# Altium PCB PCB_SensorTapeFlex_v1.PcbDoc (part 3 of 4)
Units mm, origin at the board's own origin, x right, y up, seen from the top; angles counter-clockwise.
Board outline 228.71 x 24.8 mm, 2 copper layers (Top Layer, Bottom Layer); 234 components, 38 nets, 1134 pads, 768 vias.
Unrouted connection lines stored in the file: 1.
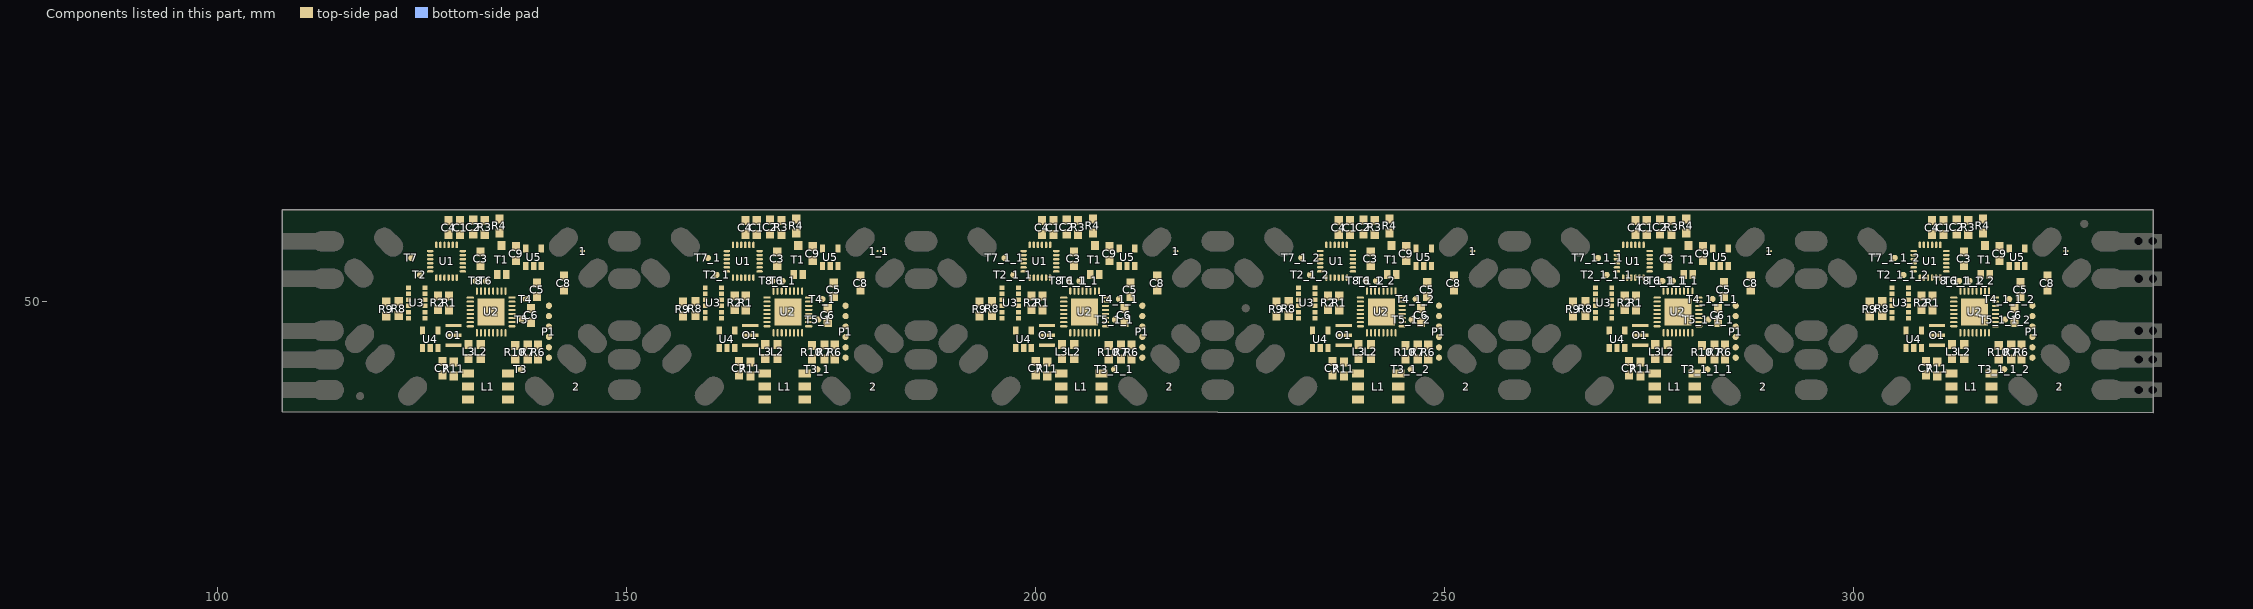
[diagram p3: the components of this part, seen from the top]

## Via types
v1: diameter 0.635, hole 0.381, Top Layer to Bottom Layer, tented both sides, 572 vias
v2: diameter 0.635, hole 0.4, Top Layer to Bottom Layer, tented both sides, 130 vias
v3: diameter 0.66, hole 0.33, Top Layer to Bottom Layer, tented both sides, 54 vias
v4: diameter 0.508, hole 0.508, Top Layer to Bottom Layer, tented both sides, 12 vias

## Nets (pads, with @x,y where several pads share a name; then routed paths per layer and width w, separated by ;. In a path a pad name is that pad's centre, name@x,y a point inside that pad or via, vN(x,y) a via of type N, cw(c..) or ccw(c..) an arc to the next point about the centre after c; other vN are vias at no path point) (continued)
copper on no net: | length 2649.3
  Top Layer w0.152: 144.189,56.217 144.424,56.21 ; v1(156.644,51.029) 159.83,54.215 160.733,54.215 ; 156.923,48.274 156.923,48.832 157.266,49.175 157.711,49.175 ; 156.923,49.974 156.923,50.479 158.193,51.749 159.654,51.749 ; 158.447,48.324 159.082,48.324 159.108,48.35 159.108,49.276 159.332,49.501 159.655,49.501 ; v1(159.082,54.686) 159.082,54.483 156.39,51.791 156.466,51.791 155.78,51.105 v1(155.78,48.336) 156.195,48.336 156.195,47.629 156.329,47.496 157.471,47.496 157.726,47.241 158.959,47.241 160.149,46.05 160.149,43.104 164.785,38.468 164.785,37.618 165.178,37.224 168.036,37.224 168.353,37.541 168.353,39.329 168.036,39.646 ; 159.654,48.002 160.119,48.002 160.555,48.438 160.555,51.969 160.86,52.273 162.219,52.273 162.511,51.981 ; 159.654,48.751 160.225,48.751 160.251,48.777 160.251,53.733 160.733,54.215 ; 159.92,54.216 159.92,55.271 ; 160.479,45.568 160.479,46.406 159.387,47.498 159.26,47.498 159.127,47.631 159.063,47.567 159.042,47.546 157.853,47.546 157.719,47.679 157.719,48.969 157.817,49.068 157.711,49.175 ; 160.479,45.619 160.479,43.409 162.867,41.021 163.781,41.021 163.781,41.035 ; 160.491,45.641 161.349,46.499 161.349,47.041 161.114,47.276 161.114,48.725 161.14,48.75 161.655,48.75 162.225,48.75 162.511,49.036 163.273,49.036 163.273,49.594 163.214,49.653 162.27,49.653 162.223,49.7 162.223,50.064 162.185,50.102 161.879,50.102 161.879,50.249 161.655,50.249 ; v1(160.835,54.788) 160.809,54.763 160.809,58.834 161.873,59.898 161.873,60.17 162.193,60.49 162.465,60.49 162.47,60.495 162.968,60.495 ; 161.038,52.261 161.038,53.34 ; 161.349,44.349 161.349,43.637 161.375,43.612 162.841,43.612 163.223,43.994 ; 161.655,49.499 161.348,49.499 161.114,49.733 161.114,51.722 161.14,51.747 161.655,51.747 161.939,51.747 162.184,51.502 162.184,50.47 162.248,50.406 162.481,50.406 162.545,50.343 162.545,49.987 162.574,49.957 165.716,49.957 ; 162.292,53.715 162.511,53.715 162.511,51.981 ; 162.292,54.215 160.733,54.215 ; 162.292,55.715 161.673,55.715 161.648,55.74 161.648,56.382 162.003,56.738 162.003,59.529 v1(162.419,59.944) ; 162.299,44.349 162.299,45.085 ; 162.92,60.49 163.804,60.49 164.124,60.17 164.124,60.095 164.289,59.93 165.94,59.93 166.753,59.93 ; 163.019,60.401 163.019,59.751 163.032,59.739 163.032,59.718 163.042,59.708 163.042,56.965 ; 163.266,49.035 164.917,49.035 ; 163.273,50.736 162.528,50.736 162.511,51.981 ; v1@163.411,54.765 164.465,54.765 164.848,54.382 165.014,54.215 166.291,54.215 166.892,54.215 167.744,55.067 167.744,55.41 168.455,56.121 ; v1(163.578,59.944) 163.578,59.081 163.578,58.256 163.603,58.23 164.289,58.23 ; 164.666,45.914 164.438,45.914 163.908,46.444 163.908,46.47 163.883,46.495 163.883,48.082 163.979,48.179 ; 164.848,54.466 164.848,56.272 164.913,56.336 165.198,56.336 165.42,56.558 165.42,56.844 165.541,56.965 165.541,57.379 165.94,57.778 165.94,58.23 ; 164.924,50.736 165.292,50.736 165.791,50.237 165.955,50.237 166.173,50.018 167.2,50.018 ; 165.152,44.706 165.465,44.706 166.278,45.52 166.542,45.52 167.008,45.986 ; 165.178,42.658 165.963,42.658 166.372,43.067 167.083,43.067 ; v1(165.394,54.796) 165.394,55.104 165.885,55.594 166.17,55.594 166.291,55.715 ; v1@165.643,47.844 165.643,48.694 166.067,49.118 166.45,49.118 166.55,49.018 167.2,49.018 ; v1@165.693,47.816 165.895,48.018 167.2,48.018 ; 165.703,49.921 165.795,49.829 165.795,49.518 167.2,49.518 ; v1@165.757,49.545 165.331,49.118 165.331,48.258 165.292,48.219 164.02,48.219 163.979,48.179 ; 165.808,47.136 166.191,47.518 167.2,47.518 ; v1(166.067,51.334) 166.067,51.352 166.1,51.384 166.169,51.384 166.41,51.626 166.41,53.048 167.783,54.421 168.455,54.421 ; 166.291,54.715 166.884,54.715 167.439,55.271 167.439,56.922 167.896,57.379 168.201,57.379 168.607,57.785 168.937,57.785 ; 166.291,55.215 166.926,55.215 167.032,55.321 167.032,57.176 167.515,57.658 167.515,57.861 ; 166.291,56.215 166.702,56.215 166.728,56.24 166.728,59.081 169.852,59.081 169.852,56.236 170.03,56.058 170.03,54.28 169.84,54.09 169.84,53.799 169.584,53.543 167.769,53.543 167.363,53.543 166.728,52.908 166.728,51.943 166.715,51.93 166.715,51.311 167.035,50.991 167.487,50.991 167.815,51.318 168,51.318 168.023,51.341 ; v1(166.293,48.539) 166.313,48.518 167.2,48.518 ; 166.728,59.905 166.753,59.93 ; 166.911,38.046 165.496,38.046 165.178,38.364 v1(165.178,40.005) 165.178,40.958 165.178,41.542 164.861,41.859 163.807,41.859 163.781,41.885 163.781,42.735 161.667,42.735 160.796,43.607 160.796,45.085 160.821,45.111 162.274,45.111 162.299,45.085 ; 166.911,39.646 168.036,39.646 ; 166.982,45.969 166.982,47.018 167.2,47.018 ; 167.083,44.767 167.083,44.981 168,45.898 168,46.218 ; v1@167.12,51.751 167.12,52.818 167.54,53.239 169.826,53.239 ; 167.2,50.518 166.664,50.518 166.509,50.673 165.835,50.673 165.5,51.008 165.5,51.381 165.345,51.537 162.956,51.537 162.511,51.981 ; v1(167.261,51.537) 167.388,51.41 167.388,51.689 v1@167.374,51.675 ; 167.82,52.502 168.484,51.837 168.484,51.217 ; 168.5,46.218 168.5,45.522 168.607,45.415 168.607,44.767 ; 168.607,43.067 168.607,42.431 168.633,42.405 172.379,42.405 172.417,42.444 172.417,43.004 ; 168.992,51.242 168.992,52.328 169.141,52.477 ; 169,46.218 169,45.632 169.217,45.415 169.217,43.299 169.806,42.71 171.772,42.71 171.96,42.898 171.96,43.815 ; v1@169.141,41.656 v1@170.396,41.656 ; 169.471,45.822 169.801,45.492 v1@169.801,44.653 ; 169.5,51.318 169.5,51.973 169.801,52.273 169.801,53.239 ; v1@169.979,43.612 170.461,44.095 170.461,44.806 170.258,45.009 170.258,45.441 170.08,45.619 170.08,45.771 170,45.851 170,46.091 ; 170,51.318 170,51.863 v1@170.284,52.146 ; 170.468,53.529 171.359,54.42 172.036,54.42 172.195,54.262 172.322,54.134 172.322,52.38 172.599,52.104 173.408,52.104 ; 170.5,46.218 170.563,46.155 170.563,45.161 171.173,44.552 v1@171.173,43.485 ; 170.5,51.318 170.5,51.643 170.854,51.997 171.647,51.997 172.257,51.387 v1@173.111,51.387 ; 170.73,52.975 170.341,52.975 170.341,56.21 170.157,56.394 170.157,57.571 170.766,58.18 ; 170.766,59.88 169.902,59.88 169.852,59.93 ; v1(170.891,54.737) 170.891,56.398 170.994,56.501 173.459,56.501 173.49,56.532 174.176,56.532 ; 171,46.218 171,45.542 171.026,45.517 176.811,45.517 ; 171.5,46.218 171.5,46.33 171.706,46.33 172.011,46.025 175.617,46.025 175.922,46.33 177.396,46.33 177.421,46.304 177.421,45.059 176.807,44.445 ; 171.5,51.318 171.59,51.318 172.036,50.872 173.124,50.872 173.459,51.207 173.459,52.096 ; v1(171.757,44.349) 171.757,44.641 171.82,44.704 172.417,44.704 ; 171.813,39.646 170.842,39.646 170.817,39.671 170.817,41.961 170.842,41.986 172.798,41.986 ; 171.813,41.246 172.777,41.246 172.9,41.123 173.763,41.123 173.992,41.351 173.992,43.079 ; 171.96,43.79 173.433,43.79 173.433,42.008 172.82,42.008 ; 172.3,47.018 172.3,46.523 172.468,46.355 175.414,46.355 176.049,46.99 ; 172.3,47.518 172.626,47.518 173.052,47.092 173.052,46.863 173.255,46.66 175.237,46.66 175.414,46.838 175.414,48.87 ; 172.3,48.518 172.925,48.518 172.904,48.54 173.89,48.54 174.449,47.981 ; 172.3,49.018 173.08,49.018 ; 172.3,50.518 172.349,50.567 173.25,50.567 v1(174.017,51.334) ; 172.392,50.059 173.42,50.059 173.804,50.442 ; 172.58,48.01 173.205,48.01 ; v1(173.56,49.454) 173.516,49.454 173.08,49.018 ; 173.941,43.054 173.941,42.596 173.945,42.596 ; 173.941,44.754 173.941,43.942 173.967,43.917 175.313,43.917 175.338,43.891 175.338,43.067 175.999,43.067 176.107,43.176 176.809,43.176 ; 174.068,52.12 173.737,52.451 173.243,52.451 172.798,52.896 172.798,55.118 175.101,55.118 ; 174.123,52.104 175.592,52.104 ; 174.176,54.382 174.176,53.67 174.202,53.645 176.051,53.645 176.076,53.67 ; 174.348,49.644 174.348,49.886 174.576,50.114 174.576,52.104 ; 174.525,49.018 173.08,49.018 ; 175.019,49.403 176.608,49.403 ; 175.11,42.748 175.11,42.418 174.5,41.809 174.5,41.351 172.792,39.643 172.792,39.051 172.658,38.917 172.053,38.917 172.049,38.913 170.382,38.913 169.649,39.646 168.036,39.646 ; 175.126,54.382 175.126,55.093 175.101,55.118 ; 175.157,55.052 175.157,56.55 174.176,57.531 173.56,57.531 171.161,59.93 169.852,59.93 ; 175.338,44.767 175.872,44.767 175.897,44.742 175.897,44.12 176.202,43.815 177.294,43.815 177.726,44.247 177.726,47.338 176.808,48.256 v1@175.846,48.26 ; 175.44,48.895 177.104,48.895 177.421,49.213 177.421,50.114 177.396,50.14 ; 175.807,50.14 177.396,50.14 ; 176.049,46.986 176.807,46.986 ; 176.076,54.382 176.076,53.67 ; v1@176.1,41.351 178.709,41.351 180.19,39.87 ; 177.142,38.964 177.65,39.472 180.164,39.472 ; 178.585,53.894 177.258,55.221 176.33,55.221 176.227,55.118 175.101,55.118 ; 178.64,51.449 176.419,53.67 176.076,53.67 ; 178.64,53.149 178.64,54.396 180.462,56.217 180.698,56.21 ; v1(179.199,48.463) 177.523,50.14 177.396,50.14 ; v1(179.936,51.334) 179.91,51.359 179.91,54.89 181.176,56.155 181.176,56.201 ; v1(192.917,51.029) 196.104,54.215 197.006,54.215 ; 193.196,48.274 193.196,48.832 193.539,49.174 193.984,49.174 ; 193.196,49.974 193.196,50.479 194.466,51.749 195.927,51.749 ; 194.72,48.324 195.355,48.324 195.381,48.349 195.381,49.276 195.606,49.501 195.928,49.501 ; v1(195.355,54.686) 195.355,54.483 192.663,51.791 192.739,51.791 192.053,51.105 v1(192.053,48.336) 192.468,48.336 192.468,47.629 192.602,47.495 193.745,47.495 193.999,47.241 195.232,47.241 196.422,46.05 196.422,43.104 201.058,38.468 201.058,37.617 201.451,37.224 204.309,37.224 204.626,37.541 204.626,39.329 204.309,39.646 ; 195.927,48.002 196.392,48.002 196.829,48.438 196.829,51.968 197.133,52.273 198.492,52.273 198.784,51.981 ; 195.927,48.751 196.498,48.751 196.524,48.777 196.524,53.733 197.006,54.215 ; 196.194,54.216 196.194,55.27 ; 196.752,45.568 196.752,46.406 195.66,47.498 195.533,47.498 195.4,47.63 195.337,47.567 195.315,47.545 194.126,47.545 193.992,47.679 193.992,48.969 194.091,49.068 193.984,49.174 ; 196.752,45.618 196.752,43.409 199.14,41.021 200.054,41.021 200.054,41.035 ; 196.764,45.641 197.622,46.499 197.622,47.041 197.387,47.276 197.387,48.724 197.413,48.75 197.928,48.75 198.498,48.75 198.784,49.036 199.546,49.036 199.546,49.594 199.487,49.653 198.543,49.653 198.496,49.7 198.496,50.063 198.458,50.101 198.152,50.101 198.152,50.249 197.928,50.249 ; v1(197.108,54.788) 197.083,54.762 197.083,58.834 198.146,59.898 198.146,60.17 198.466,60.49 198.738,60.49 198.743,60.495 199.241,60.495 ; 197.311,52.261 197.311,53.34 ; 197.622,44.349 197.622,43.637 197.648,43.612 199.115,43.612 199.496,43.994 ; 197.929,49.499 197.621,49.499 197.387,49.733 197.387,51.722 197.413,51.747 197.928,51.747 198.212,51.747 198.457,51.502 198.457,50.47 198.521,50.406 198.754,50.406 198.818,50.343 198.818,49.987 198.848,49.957 201.989,49.957 ; 198.565,53.715 198.784,53.715 198.784,51.981 ; 198.565,54.215 197.006,54.215 ; 198.565,55.715 197.946,55.715 197.921,55.74 197.921,56.382 198.276,56.738 198.276,59.528 v1(198.692,59.944) ; 198.572,44.349 198.572,45.085 ; 199.193,60.49 200.077,60.49 200.397,60.17 200.397,60.095 200.562,59.93 202.213,59.93 203.026,59.93 ; 199.292,60.401 199.292,59.751 199.305,59.738 199.305,59.718 199.315,59.708 199.315,56.965 ; 199.539,49.035 201.19,49.035 ; 199.546,50.736 198.801,50.736 198.784,51.981 ; v1@199.684,54.765 200.738,54.765 201.121,54.382 201.287,54.215 202.564,54.215 203.165,54.215 204.017,55.067 204.017,55.41 204.728,56.121 ; v1(199.851,59.944) 199.851,59.08 199.851,58.255 199.877,58.23 200.562,58.23 ; 200.939,45.914 200.711,45.914 200.181,46.444 200.181,46.47 200.156,46.495 200.156,48.082 200.252,48.179 ; 201.121,54.466 201.121,56.271 201.186,56.336 201.471,56.336 201.693,56.558 201.693,56.844 201.815,56.965 201.815,57.379 202.213,57.777 202.213,58.23 ; 201.197,50.736 201.565,50.736 202.065,50.237 202.228,50.237 202.447,50.018 203.473,50.018 ; 201.425,44.706 201.738,44.706 202.552,45.52 202.815,45.52 203.281,45.986 ; 201.451,42.658 202.236,42.658 202.645,43.067 203.356,43.067 ; v1(201.667,54.796) 201.667,55.104 202.158,55.594 202.443,55.594 202.564,55.715 ; v1@201.916,47.844 201.916,48.694 202.34,49.118 202.723,49.118 202.823,49.018 203.473,49.018 ; v1@201.966,47.816 202.168,48.018 203.473,48.018 ; 201.976,49.921 202.068,49.829 202.068,49.518 203.473,49.518 ; v1@202.03,49.545 201.604,49.118 201.604,48.258 201.565,48.219 200.293,48.219 200.252,48.179 ; 202.082,47.136 202.464,47.518 203.473,47.518 ; v1(202.34,51.333) 202.34,51.352 202.373,51.384 202.442,51.384 202.683,51.626 202.683,53.048 204.056,54.421 204.728,54.421 ; 202.564,54.715 203.157,54.715 203.712,55.27 203.712,56.921 204.169,57.379 204.474,57.379 204.88,57.785 205.211,57.785 ; 202.564,55.215 203.2,55.215 203.306,55.321 203.306,57.175 203.788,57.658 203.788,57.861 ; 202.564,56.215 202.975,56.215 203.001,56.24 203.001,59.08 206.125,59.08 206.125,56.236 206.303,56.058 206.303,54.28 206.113,54.09 206.113,53.799 205.857,53.543 204.042,53.543 203.636,53.543 203.001,52.908 203.001,51.943 202.988,51.93 202.988,51.31 203.308,50.991 203.76,50.991 204.088,51.318 204.273,51.318 204.296,51.341 ; v1(202.566,48.539) 202.587,48.518 203.473,48.518 ; 203.001,59.905 203.026,59.93 ; 203.184,38.046 201.769,38.046 201.451,38.364 v1(201.451,40.005) 201.451,40.958 201.451,41.542 201.134,41.859 200.08,41.859 200.054,41.885 200.054,42.735 197.94,42.735 197.069,43.607 197.069,45.085 197.094,45.11 198.547,45.11 198.572,45.085 ; 203.185,39.646 204.309,39.646 ; 203.255,45.969 203.255,47.018 203.473,47.018 ; 203.356,44.767 203.356,44.981 204.273,45.898 204.273,46.218 ; v1@203.393,51.751 203.393,52.818 203.814,53.238 206.1,53.238 ; 203.473,50.518 202.937,50.518 202.782,50.673 202.108,50.673 201.774,51.008 201.774,51.381 201.618,51.537 199.229,51.537 198.784,51.981 ; v1(203.534,51.537) 203.661,51.41 203.661,51.689 v1@203.647,51.675 ; 204.093,52.502 204.757,51.837 204.757,51.216 ; 204.773,46.218 204.773,45.522 204.88,45.415 204.88,44.767 ; 204.88,43.067 204.88,42.431 204.906,42.405 208.652,42.405 208.69,42.443 208.69,43.004 ; 205.265,51.242 205.265,52.328 205.414,52.476 ; 205.273,46.218 205.273,45.632 205.49,45.415 205.49,43.299 206.079,42.71 208.045,42.71 208.233,42.898 208.233,43.815 ; v1@205.414,41.656 v1@206.669,41.656 ; 205.744,45.822 206.074,45.491 v1@206.074,44.653 ; 205.773,51.318 205.773,51.972 206.074,52.273 206.074,53.238 ; v1@206.252,43.612 206.735,44.094 206.735,44.806 206.531,45.009 206.531,45.441 206.354,45.618 206.354,45.771 206.273,45.851 206.273,46.091 ; 206.273,51.318 206.273,51.863 v1@206.557,52.146 ; 206.741,53.529 207.632,54.42 208.309,54.42 208.468,54.262 208.595,54.134 208.595,52.38 208.872,52.103 209.681,52.103 ; 206.773,46.218 206.836,46.155 206.836,45.161 207.446,44.552 v1@207.446,43.485 ; 206.773,51.318 206.773,51.643 207.127,51.997 207.92,51.997 208.53,51.387 v1@209.384,51.387 ; 207.003,52.975 206.614,52.975 206.614,56.21 206.43,56.394 206.43,57.57 207.039,58.18 ; 207.039,59.88 206.175,59.88 206.125,59.93 ; v1(207.164,54.737) 207.164,56.398 207.267,56.501 209.732,56.501 209.763,56.532 210.449,56.532 ; 207.273,46.218 207.273,45.542 207.299,45.517 213.085,45.517 ; 207.773,46.218 207.773,46.33 207.979,46.33 208.284,46.025 211.89,46.025 212.195,46.33 213.669,46.33 213.694,46.304 213.694,45.059 213.08,44.445 ; 207.773,51.318 207.863,51.318 208.309,50.872 209.397,50.872 209.732,51.206 209.732,52.095 ; v1(208.03,44.348) 208.03,44.641 208.093,44.704 208.69,44.704 ; 208.086,39.646 207.116,39.646 207.09,39.671 207.09,41.961 207.116,41.986 209.071,41.986 ; 208.086,41.246 209.05,41.246 209.173,41.123 210.037,41.123 210.265,41.351 210.265,43.078 ; 208.233,43.79 209.706,43.79 209.706,42.008 209.093,42.008 ; 208.573,47.018 208.573,46.523 208.741,46.355 211.688,46.355 212.323,46.99 ; 208.573,47.518 208.899,47.518 209.325,47.092 209.325,46.863 209.529,46.66 211.51,46.66 211.688,46.838 211.688,48.87 ; 208.573,48.518 209.198,48.518 209.177,48.539 210.164,48.539 210.722,47.981 ; 208.573,49.018 209.353,49.018 ; 208.573,50.518 208.622,50.567 209.523,50.567 v1@210.29,51.333 ; 208.665,50.059 209.693,50.059 210.077,50.442 ; 208.853,48.01 209.478,48.01 ; v1(209.833,49.454) 209.789,49.454 209.353,49.018 ; 210.214,43.054 210.214,42.596 210.218,42.596 ; 210.214,44.754 210.214,43.942 210.24,43.917 211.586,43.917 211.611,43.891 211.611,43.067 212.272,43.067 212.38,43.175 213.082,43.175 ; 210.341,52.12 210.01,52.451 209.516,52.451 209.071,52.896 209.071,55.118 211.374,55.118 ; 210.396,52.103 211.865,52.103 ; 210.449,54.382 210.449,53.67 210.475,53.645 212.324,53.645 212.349,53.67 ; 210.621,49.644 210.621,49.886 210.849,50.114 210.849,52.103 ; 210.799,49.018 209.353,49.018 ; 211.293,49.403 212.881,49.403 ; 211.383,42.748 211.383,42.418 210.773,41.808 210.773,41.351 209.065,39.643 209.065,39.051 208.931,38.917 208.327,38.917 208.322,38.913 206.655,38.913 205.922,39.646 204.309,39.646 ; 211.399,54.382 211.399,55.093 211.374,55.118 ; 211.43,55.052 211.43,56.55 210.449,57.531 209.833,57.531 207.434,59.93 206.125,59.93 ; 211.611,44.767 212.145,44.767 212.17,44.742 212.17,44.12 212.475,43.815 213.567,43.815 213.999,44.247 213.999,47.338 213.081,48.256 v1@212.119,48.26 ; 211.713,48.895 213.377,48.895 213.694,49.213 213.694,50.114 213.669,50.14 ; 212.08,50.14 213.669,50.14 ; 212.323,46.985 213.08,46.985 ; 212.349,54.382 212.349,53.67 ; v1@212.373,41.351 214.982,41.351 216.463,39.87 ; 213.415,38.964 213.923,39.472 216.437,39.472 ; 214.858,53.894 213.531,55.221 212.603,55.221 212.5,55.118 211.374,55.118 ; 214.913,51.449 212.692,53.67 212.349,53.67 ; 214.913,53.149 214.913,54.396 216.735,56.217 216.971,56.21 ; v1(215.472,48.463) 213.796,50.14 213.669,50.14 ; v1(216.209,51.333) 216.183,51.359 216.183,54.889 217.449,56.155 217.449,56.201 ; v1(229.189,51.03) 232.375,54.216 233.278,54.216 ; 229.468,48.275 229.468,48.833 229.811,49.176 230.255,49.176 ; 229.468,49.975 229.468,50.48 230.738,51.75 232.199,51.75 ; 230.992,48.325 231.627,48.325 231.652,48.351 231.652,49.277 231.877,49.502 232.199,49.502 ; v1(231.627,54.687) 231.627,54.484 228.935,51.792 229.011,51.792 228.325,51.106 v1(228.325,48.337) 228.739,48.337 228.739,47.631 228.873,47.497 230.016,47.497 230.271,47.242 231.503,47.242 232.694,46.051 232.694,43.105 237.329,38.47 237.329,37.619 237.723,37.225 240.581,37.225 240.898,37.542 240.898,39.33 240.581,39.647 ; 232.199,48.003 232.664,48.003 233.1,48.439 233.1,51.97 233.405,52.274 234.764,52.274 235.056,51.982 ; 232.199,48.753 232.77,48.753 232.795,48.778 232.795,53.734 233.278,54.216 ; 232.465,54.218 232.465,55.272 ; 233.024,45.569 233.024,46.407 231.932,47.499 231.804,47.499 231.672,47.632 231.608,47.568 231.587,47.547 230.397,47.547 230.263,47.681 230.263,48.97 230.362,49.069 230.255,49.176 ; 233.024,45.62 233.024,43.41 235.412,41.022 236.326,41.022 236.326,41.036 ; 233.036,45.642 233.894,46.5 233.894,47.042 233.659,47.277 233.659,48.726 233.684,48.751 234.2,48.751 234.77,48.751 235.056,49.037 235.818,49.037 235.818,49.595 235.759,49.654 234.814,49.654 234.768,49.701 234.768,50.065 234.73,50.103 234.424,50.103 234.424,50.25 234.2,50.25 ; v1(233.38,54.789) 233.354,54.764 233.354,58.836 234.418,59.899 234.418,60.171 234.737,60.491 235.01,60.491 235.015,60.496 235.513,60.496 ; 233.583,52.262 233.583,53.341 ; 233.894,44.35 233.894,43.638 233.919,43.613 235.386,43.613 235.768,43.995 ; 234.2,49.5 233.893,49.5 233.659,49.734 233.659,51.723 233.684,51.748 234.2,51.748 234.483,51.748 234.729,51.503 234.729,50.471 234.793,50.407 235.026,50.407 235.089,50.344 235.089,49.988 235.119,49.959 238.261,49.959 ; 234.837,53.716 235.056,53.716 235.056,51.982 ; 234.837,54.216 233.278,54.216 ; 234.837,55.716 234.218,55.716 234.192,55.741 234.192,56.384 234.548,56.739 234.548,59.53 v1(234.964,59.945) ; 234.844,44.35 234.844,45.086 ; 235.465,60.491 236.349,60.491 236.669,60.171 236.669,60.096 236.834,59.931 238.485,59.931 239.298,59.931 ; 235.564,60.402 235.564,59.752 235.577,59.74 235.577,59.719 235.587,59.709 235.587,56.966 ; 235.811,49.036 237.462,49.036 ; 235.818,50.737 235.072,50.737 235.056,51.982 ; v1@235.955,54.766 237.01,54.766 237.393,54.383 237.559,54.217 238.836,54.217 239.437,54.217 240.288,55.068 240.288,55.411 241,56.122 ; v1(236.123,59.945) 236.123,59.082 236.123,58.257 236.148,58.231 236.834,58.231 ; 237.211,45.915 236.982,45.915 236.453,46.445 236.453,46.471 236.428,46.496 236.428,48.083 236.524,48.18 ; 237.393,54.467 237.393,56.273 237.458,56.337 237.743,56.337 237.965,56.559 237.965,56.845 238.086,56.966 238.086,57.38 238.485,57.779 238.485,58.231 ; 237.469,50.737 237.837,50.737 238.336,50.238 238.499,50.238 238.718,50.019 239.745,50.019 ; 237.697,44.708 238.009,44.708 238.823,45.521 239.087,45.521 239.553,45.987 ; 237.723,42.659 238.508,42.659 238.917,43.068 239.628,43.068 ; v1(237.939,54.797) 237.939,55.105 238.429,55.595 238.715,55.595 238.836,55.716 ; v1@238.188,47.845 238.188,48.695 238.612,49.119 238.995,49.119 239.095,49.019 239.745,49.019 ; v1@238.238,47.817 238.44,48.019 239.745,48.019 ; 238.248,49.922 238.34,49.83 238.34,49.519 239.745,49.519 ; v1@238.302,49.546 237.875,49.119 237.875,48.259 237.837,48.22 236.565,48.22 236.524,48.18 ; 238.353,47.137 238.735,47.519 239.745,47.519 ; v1(238.612,51.335) 238.612,51.353 238.644,51.385 238.714,51.385 238.955,51.627 238.955,53.049 240.328,54.422 241,54.422 ; 238.836,54.716 239.428,54.716 239.984,55.272 239.984,56.923 240.441,57.38 240.746,57.38 241.152,57.786 241.482,57.786 ; 238.836,55.216 239.471,55.216 239.577,55.322 239.577,57.177 240.06,57.659 240.06,57.862 ; 238.836,56.216 239.247,56.216 239.272,56.241 239.272,59.082 242.397,59.082 242.397,56.237 242.574,56.059 242.574,54.281 242.384,54.091 242.384,53.8 242.129,53.544 240.314,53.544 239.907,53.544 239.272,52.909 239.272,51.944 239.26,51.932 239.26,51.312 239.58,50.992 240.032,50.992 240.36,51.319 240.545,51.319 240.568,51.342 ; v1(238.838,48.54) 238.858,48.519 239.745,48.519 ; 239.272,59.906 239.298,59.931 ; 239.456,38.047 238.041,38.047 237.723,38.365 v1(237.723,40.006) 237.723,40.959 237.723,41.543 237.406,41.86 236.351,41.86 236.326,41.886 236.326,42.736 234.212,42.736 233.34,43.608 233.34,45.086 233.366,45.112 234.819,45.112 234.844,45.086 ; 239.456,39.647 240.581,39.647 ; 239.526,45.97 239.526,47.019 239.745,47.019 ; 239.628,44.768 239.628,44.982 240.545,45.899 240.545,46.219 ; v1@239.665,51.752 239.665,52.819 240.085,53.24 242.371,53.24 ; 239.745,50.519 239.209,50.519 239.054,50.674 238.38,50.674 238.045,51.009 238.045,51.382 237.889,51.538 235.501,51.538 235.056,51.982 ; v1(239.806,51.538) 239.933,51.411 239.933,51.69 v1@239.919,51.676 ; 240.365,52.503 241.029,51.839 241.029,51.218 ; 241.045,46.219 241.045,45.523 241.152,45.416 241.152,44.768 ; 241.152,43.068 241.152,42.432 241.177,42.407 244.924,42.407 244.962,42.445 244.962,43.005 ; 241.537,51.243 241.537,52.329 241.685,52.478 ; 241.545,46.219 241.545,45.633 241.762,45.416 241.762,43.3 242.351,42.711 244.317,42.711 244.505,42.899 244.505,43.816 ; v1@241.685,41.657 v1@242.941,41.657 ; 242.016,45.823 242.346,45.493 v1@242.346,44.654 ; 242.045,51.319 242.045,51.974 242.346,52.274 242.346,53.24 ; v1@242.524,43.613 243.006,44.096 243.006,44.807 242.803,45.01 242.803,45.442 242.625,45.62 242.625,45.772 242.545,45.852 242.545,46.092 ; 242.545,51.319 242.545,51.864 v1@242.828,52.147 ; 243.013,53.531 243.904,54.421 244.581,54.421 244.74,54.263 244.867,54.135 244.867,52.381 245.143,52.105 245.953,52.105 ; 243.045,46.219 243.108,46.156 243.108,45.162 243.717,44.553 v1@243.717,43.486 ; 243.045,51.319 243.045,51.644 243.399,51.998 244.192,51.998 244.801,51.388 v1@245.656,51.388 ; 243.275,52.976 242.886,52.976 242.886,56.211 242.701,56.396 242.701,57.572 243.311,58.181 ; 243.311,59.881 242.447,59.881 242.397,59.931 ; v1(243.436,54.738) 243.436,56.399 243.539,56.502 246.003,56.502 246.035,56.533 246.721,56.533 ; 243.545,46.219 243.545,45.543 243.57,45.518 249.356,45.518 ; 244.045,46.219 244.045,46.331 244.251,46.331 244.556,46.026 248.162,46.026 248.467,46.331 249.94,46.331 249.966,46.305 249.966,45.06 249.352,44.446 ; 244.045,51.319 244.135,51.319 244.581,50.873 245.669,50.873 246.003,51.208 246.003,52.097 ; v1(244.302,44.35) 244.302,44.642 244.365,44.705 244.962,44.705 ; 244.358,39.647 243.387,39.647 243.362,39.673 243.362,41.962 243.387,41.987 245.343,41.987 ; 244.358,41.247 245.322,41.247 245.445,41.124 246.308,41.124 246.537,41.352 246.537,43.08 ; 244.505,43.791 245.978,43.791 245.978,42.009 245.364,42.009 ; 244.845,47.019 244.845,46.524 245.013,46.356 247.959,46.356 248.594,46.991 ; 244.845,47.519 245.171,47.519 245.597,47.093 245.597,46.864 245.8,46.661 247.781,46.661 247.959,46.839 247.959,48.871 ; 244.845,48.519 245.47,48.519 245.449,48.541 246.435,48.541 246.994,47.982 ; 244.845,49.019 245.625,49.019 ; 244.845,50.519 244.894,50.568 245.795,50.568 v1@246.562,51.335 ; 244.937,50.06 245.965,50.06 246.349,50.443 ; 245.124,48.011 245.749,48.011 ; v1(246.105,49.455) 246.061,49.455 245.625,49.019 ; 246.486,43.055 246.486,42.597 246.49,42.597 ; 246.486,44.755 246.486,43.943 246.511,43.918 247.858,43.918 247.883,43.892 247.883,43.068 248.543,43.068 248.652,43.177 249.354,43.177 ; 246.613,52.121 246.282,52.452 245.788,52.452 245.343,52.897 245.343,55.119 247.646,55.119 ; 246.667,52.105 248.137,52.105 ; 246.721,54.383 246.721,53.671 246.746,53.646 248.596,53.646 248.621,53.671 ; 246.892,49.645 246.892,49.887 247.121,50.115 247.121,52.105 ; 247.07,49.019 245.625,49.019 ; 247.564,49.404 249.153,49.404 ; 247.654,42.749 247.654,42.419 247.045,41.81 247.045,41.352 245.336,39.644 245.336,39.052 245.202,38.919 244.598,38.919 244.594,38.914 242.927,38.914 242.193,39.647 240.581,39.647 ; 247.671,54.383 247.671,55.094 247.646,55.119 ; 247.702,55.053 247.702,56.552 246.721,57.532 246.105,57.532 243.706,59.931 242.397,59.931 ; 247.883,44.768 248.416,44.768 248.442,44.743 248.442,44.121 248.747,43.816 249.839,43.816 250.271,44.248 250.271,47.339 249.352,48.257 v1@248.391,48.261 ; 247.985,48.896 249.648,48.896 249.966,49.214 249.966,50.115 249.94,50.141 ; 248.352,50.141 249.94,50.141 ; 248.594,46.987 249.352,46.987 ; 248.621,54.383 248.621,53.671 ; v1@248.645,41.352 251.254,41.352 252.734,39.871 ; 249.686,38.965 250.194,39.473 252.709,39.473 ; 251.13,53.895 249.803,55.222 248.875,55.222 248.772,55.119 247.646,55.119 ; 251.185,51.45 248.964,53.671 248.621,53.671 ; 251.185,53.15 251.185,54.397 253.007,56.219 253.242,56.211 ; v1(251.744,48.464) 250.068,50.141 249.94,50.141 ; v1(252.48,51.335) 252.455,51.36 252.455,54.891 253.721,56.156 253.721,56.202 ; v1(265.462,51.03) 268.648,54.216 269.551,54.216 ; 265.741,48.275 265.741,48.833 266.084,49.176 266.529,49.176 ; 265.741,49.975 265.741,50.48 267.011,51.75 268.472,51.75 ; 267.265,48.325 267.9,48.325 267.926,48.351 267.926,49.277 268.15,49.502 268.472,49.502 ; v1(267.9,54.687) 267.9,54.484 265.208,51.792 265.284,51.792 264.598,51.106 v1(264.598,48.337) 265.013,48.337 265.013,47.63 265.146,47.497 266.289,47.497 266.544,47.242 267.777,47.242 268.967,46.051 268.967,43.105 273.602,38.469 273.602,37.619 273.996,37.225 276.854,37.225 277.171,37.542 277.171,39.33 276.854,39.647 ; 268.472,48.003 268.937,48.003 269.373,48.439 269.373,51.97 269.678,52.274 271.037,52.274 271.329,51.982 ; 268.472,48.753 269.043,48.753 269.069,48.778 269.069,53.734 269.551,54.216 ; 268.738,54.217 268.738,55.272 ; 269.297,45.569 269.297,46.407 268.205,47.499 268.077,47.499 267.945,47.632 267.881,47.568 267.86,47.547 266.67,47.547 266.537,47.68 266.537,48.97 266.635,49.069 266.529,49.176 ; 269.297,45.62 269.297,43.41 271.685,41.022 272.599,41.022 272.599,41.036 ; 269.309,45.642 270.167,46.5 270.167,47.042 269.932,47.277 269.932,48.726 269.958,48.751 270.473,48.751 271.043,48.751 271.329,49.037 272.091,49.037 272.091,49.595 272.032,49.654 271.088,49.654 271.041,49.701 271.041,50.065 271.003,50.103 270.697,50.103 270.697,50.25 270.473,50.25 ; v1(269.653,54.789) 269.627,54.764 269.627,58.836 270.691,59.899 270.691,60.171 271.011,60.491 271.283,60.491 271.288,60.496 271.786,60.496 ; 269.856,52.262 269.856,53.341 ; 270.167,44.35 270.167,43.638 270.193,43.613 271.659,43.613 272.041,43.995 ; 270.473,49.5 270.166,49.5 269.932,49.734 269.932,51.723 269.958,51.748 270.473,51.748 270.757,51.748 271.002,51.503 271.002,50.471 271.066,50.407 271.299,50.407 271.363,50.344 271.363,49.988 271.392,49.959 274.534,49.959 ; 271.11,53.716 271.329,53.716 271.329,51.982 ; 271.11,54.216 269.551,54.216 ; 271.11,55.716 270.491,55.716 270.466,55.741 270.466,56.384 270.821,56.739 270.821,59.53 v1(271.237,59.945) ; 271.117,44.35 271.117,45.086 ; 271.738,60.491 272.622,60.491 272.942,60.171 272.942,60.096 273.107,59.931 274.758,59.931 275.571,59.931 ; 271.837,60.402 271.837,59.752 271.85,59.74 271.85,59.719 271.86,59.709 271.86,56.966 ; 272.084,49.036 273.735,49.036 ; 272.091,50.737 271.345,50.737 271.329,51.982 ; v1@272.229,54.766 273.283,54.766 273.666,54.383 273.832,54.217 275.109,54.217 275.71,54.217 276.562,55.068 276.562,55.411 277.273,56.122 ; v1(272.396,59.945) 272.396,59.082 272.396,58.257 272.421,58.231 273.107,58.231 ; 273.484,45.915 273.256,45.915 272.726,46.445 272.726,46.471 272.701,46.496 272.701,48.083 272.797,48.18 ; 273.666,54.467 273.666,56.273 273.731,56.337 274.016,56.337 274.238,56.559 274.238,56.845 274.359,56.966 274.359,57.38 274.758,57.779 274.758,58.231 ; 273.742,50.737 274.11,50.737 274.609,50.238 274.773,50.238 274.991,50.019 276.018,50.019 ; 273.97,44.708 274.283,44.708 275.096,45.521 275.36,45.521 275.826,45.987 ; 273.996,42.659 274.781,42.659 275.19,43.068 275.901,43.068 ; v1(274.212,54.797) 274.212,55.105 274.702,55.595 274.988,55.595 275.109,55.716 ; v1@274.461,47.845 274.461,48.695 274.885,49.119 275.268,49.119 275.368,49.019 276.018,49.019 ; v1@274.511,47.817 274.713,48.019 276.018,48.019 ; 274.521,49.922 274.613,49.83 274.613,49.519 276.018,49.519 ; v1@274.575,49.546 274.149,49.119 274.149,48.259 274.11,48.22 272.838,48.22 272.797,48.18 ; 274.626,47.137 275.008,47.519 276.018,47.519 ; v1(274.885,51.335) 274.885,51.353 274.918,51.385 274.987,51.385 275.228,51.627 275.228,53.049 276.601,54.422 277.273,54.422 ; 275.109,54.716 275.702,54.716 276.257,55.272 276.257,56.923 276.714,57.38 277.019,57.38 277.425,57.786 277.755,57.786 ; 275.109,55.216 275.744,55.216 275.85,55.322 275.85,57.177 276.333,57.659 276.333,57.862 ; 275.109,56.216 275.52,56.216 275.546,56.241 275.546,59.082 278.67,59.082 278.67,56.237 278.848,56.059 278.848,54.281 278.658,54.091 278.658,53.8 278.402,53.544 276.587,53.544 276.181,53.544 275.546,52.909 275.546,51.944 275.533,51.931 275.533,51.312 275.853,50.992 276.305,50.992 276.633,51.319 276.818,51.319 276.841,51.342 ; v1(275.111,48.54) 275.131,48.519 276.018,48.519 ; 275.546,59.906 275.571,59.931 ; 275.729,38.047 274.314,38.047 273.996,38.365 v1(273.996,40.006) 273.996,40.959 273.996,41.543 273.679,41.86 272.625,41.86 272.599,41.886 272.599,42.736 270.485,42.736 269.614,43.608 269.614,45.086 269.639,45.112 271.092,45.112 271.117,45.086 ; 275.729,39.647 276.854,39.647 ; 275.8,45.97 275.8,47.019 276.018,47.019 ; 275.901,44.768 275.901,44.982 276.818,45.899 276.818,46.219 ; v1@275.938,51.752 275.938,52.819 276.358,53.24 278.644,53.24 ; 276.018,50.519 275.482,50.519 275.327,50.674 274.653,50.674 274.318,51.009 274.318,51.382 274.162,51.538 271.774,51.538 271.329,51.982 ; v1(276.079,51.538) 276.206,51.411 276.206,51.69 v1@276.192,51.676 ; 276.638,52.503 277.302,51.839 277.302,51.218 ; 277.318,46.219 277.318,45.523 277.425,45.416 277.425,44.768 ; 277.425,43.068 277.425,42.432 277.451,42.406 281.197,42.406 281.235,42.445 281.235,43.005 ; 277.81,51.243 277.81,52.329 277.959,52.478 ; 277.818,46.219 277.818,45.633 278.035,45.416 278.035,43.3 278.624,42.711 280.59,42.711 280.778,42.899 280.778,43.816 ; v1@277.959,41.657 v1@279.214,41.657 ; 278.289,45.823 278.619,45.493 v1@278.619,44.654 ; 278.318,51.319 278.318,51.974 278.619,52.274 278.619,53.24 ; v1@278.797,43.613 279.279,44.096 279.279,44.807 279.076,45.01 279.076,45.442 278.898,45.62 278.898,45.772 278.818,45.852 278.818,46.092 ; 278.818,51.319 278.818,51.864 v1@279.102,52.147 ; 279.286,53.53 280.177,54.421 280.854,54.421 281.013,54.263 281.14,54.135 281.14,52.381 281.416,52.105 282.226,52.105 ; 279.318,46.219 279.381,46.156 279.381,45.162 279.991,44.553 v1@279.991,43.486 ; 279.318,51.319 279.318,51.644 279.672,51.998 280.465,51.998 281.075,51.388 v1@281.929,51.388 ; 279.548,52.976 279.159,52.976 279.159,56.211 278.975,56.395 278.975,57.572 279.584,58.181 ; 279.584,59.881 278.72,59.881 278.67,59.931 ; v1(279.709,54.738) 279.709,56.399 279.812,56.502 282.277,56.502 282.308,56.533 282.994,56.533 ; 279.818,46.219 279.818,45.543 279.844,45.518 285.629,45.518 ; 280.318,46.219 280.318,46.331 280.524,46.331 280.829,46.026 284.435,46.026 284.74,46.331 286.214,46.331 286.239,46.305 286.239,45.06 285.625,44.446 ; 280.318,51.319 280.408,51.319 280.854,50.873 281.942,50.873 282.277,51.208 282.277,52.097 ; v1(280.575,44.35) 280.575,44.642 280.638,44.705 281.235,44.705 ; 280.631,39.647 279.66,39.647 279.635,39.673 279.635,41.962 279.66,41.987 281.616,41.987 ; 280.631,41.247 281.595,41.247 281.718,41.124 282.581,41.124 282.81,41.352 282.81,43.08 ; 280.778,43.791 282.251,43.791 282.251,42.009 281.638,42.009 ; 281.118,47.019 281.118,46.524 281.286,46.356 284.232,46.356 284.867,46.991 ; 281.118,47.519 281.444,47.519 281.87,47.093 281.87,46.864 282.073,46.661 284.055,46.661 284.232,46.839 284.232,48.871 ; 281.118,48.519 281.743,48.519 281.722,48.541 282.708,48.541 283.267,47.982 ; 281.118,49.019 281.898,49.019 ; 281.118,50.519 281.167,50.568 282.068,50.568 v1@282.835,51.335 ; 281.21,50.06 282.238,50.06 282.622,50.443 ; 281.398,48.011 282.023,48.011 ; v1(282.378,49.455) 282.334,49.455 281.898,49.019 ; 282.759,43.055 282.759,42.597 282.763,42.597 ; 282.759,44.755 282.759,43.943 282.785,43.918 284.131,43.918 284.156,43.892 284.156,43.068 284.817,43.068 284.925,43.177 285.627,43.177 ; 282.886,52.121 282.555,52.452 282.061,52.452 281.616,52.897 281.616,55.119 283.919,55.119 ; 282.94,52.105 284.41,52.105 ; 282.994,54.383 282.994,53.671 283.02,53.646 284.869,53.646 284.894,53.671 ; 283.166,49.645 283.166,49.887 283.394,50.115 283.394,52.105 ; 283.343,49.019 281.898,49.019 ; 283.837,49.404 285.426,49.404 ; 283.928,42.749 283.928,42.419 283.318,41.81 283.318,41.352 281.61,39.644 281.61,39.052 281.476,38.919 280.871,38.919 280.867,38.914 279.2,38.914 278.467,39.647 276.854,39.647 ; 283.944,54.383 283.944,55.094 283.919,55.119 ; 283.975,55.053 283.975,56.552 282.994,57.532 282.378,57.532 279.979,59.931 278.67,59.931 ; 284.156,44.768 284.69,44.768 284.715,44.743 284.715,44.121 285.02,43.816 286.112,43.816 286.544,44.248 286.544,47.339 285.625,48.257 v1@284.664,48.261 ; 284.258,48.896 285.921,48.896 286.239,49.214 286.239,50.115 286.214,50.141 ; 284.625,50.141 286.214,50.141 ; 284.867,46.987 285.625,46.987 ; 284.894,54.383 284.894,53.671 ; v1@284.918,41.352 287.527,41.352 289.008,39.871 ; 285.96,38.965 286.468,39.473 288.982,39.473 ; 287.403,53.895 286.076,55.222 285.148,55.222 285.045,55.119 283.919,55.119 ; 287.458,51.45 285.237,53.671 284.894,53.671 ; 287.458,53.15 287.458,54.397 289.28,56.219 289.516,56.211 ; v1(288.017,48.464) 286.341,50.141 286.214,50.141 ; v1(288.754,51.335) 288.728,51.36 288.728,54.891 289.994,56.156 289.994,56.202 ; v1(301.735,51.03) 304.922,54.217 305.824,54.217 ; 302.014,48.276 302.014,48.833 302.357,49.176 302.802,49.176 ; 302.014,49.976 302.014,50.48 303.284,51.75 304.745,51.75 ; 303.538,48.326 304.173,48.326 304.199,48.351 304.199,49.278 304.424,49.502 304.746,49.502 ; v1(304.173,54.688) 304.173,54.485 301.481,51.792 301.557,51.792 300.871,51.106 v1(300.871,48.338) 301.286,48.338 301.286,47.631 301.42,47.497 302.563,47.497 302.818,47.242 304.05,47.242 305.24,46.052 305.24,43.105 309.876,38.47 309.876,37.619 310.269,37.225 313.127,37.225 313.444,37.543 313.444,39.33 313.127,39.648 ; 304.745,48.003 305.21,48.003 305.647,48.439 305.647,51.97 305.951,52.275 307.31,52.275 307.602,51.983 ; 304.745,48.753 305.316,48.753 305.342,48.778 305.342,53.734 305.824,54.217 ; 305.012,54.218 305.012,55.272 ; 305.57,45.569 305.57,46.407 304.478,47.499 304.351,47.499 304.218,47.632 304.155,47.568 304.133,47.547 302.944,47.547 302.81,47.681 302.81,48.97 302.909,49.069 302.802,49.176 ; 305.57,45.62 305.57,43.41 307.958,41.023 308.872,41.023 308.872,41.037 ; 305.582,45.642 306.44,46.501 306.44,47.042 306.205,47.277 306.205,48.726 306.231,48.751 306.746,48.751 307.316,48.751 307.602,49.038 308.364,49.038 308.364,49.595 308.305,49.654 307.361,49.654 307.314,49.701 307.314,50.065 307.276,50.103 306.971,50.103 306.971,50.251 306.746,50.251 ; v1(305.926,54.789) 305.901,54.764 305.901,58.836 306.964,59.899 306.964,60.172 307.284,60.492 307.556,60.492 307.562,60.497 308.059,60.497 ; 306.129,52.262 306.129,53.342 ; 306.44,44.351 306.44,43.639 306.466,43.613 307.933,43.613 308.314,43.995 ; 306.747,49.501 306.439,49.501 306.205,49.735 306.205,51.723 306.231,51.749 306.746,51.749 307.03,51.749 307.275,51.503 307.275,50.471 307.339,50.408 307.572,50.408 307.636,50.344 307.636,49.989 307.666,49.959 310.808,49.959 ; 307.383,53.717 307.602,53.717 307.602,51.983 ; 307.383,54.217 305.824,54.217 ; 307.383,55.716 306.764,55.716 306.739,55.742 306.739,56.384 307.094,56.74 307.094,59.53 v1(307.51,59.946) ; 307.391,44.351 307.391,45.087 ; 308.011,60.492 308.895,60.492 309.215,60.172 309.215,60.097 309.38,59.932 311.031,59.932 311.844,59.932 ; 308.11,60.403 308.11,59.753 308.123,59.74 308.123,59.719 308.133,59.709 308.133,56.966 ; 308.357,49.036 310.008,49.036 ; 308.364,50.738 307.619,50.738 307.602,51.983 ; v1@308.502,54.766 309.557,54.766 309.939,54.384 ; v1(308.669,59.946) 308.669,59.082 308.669,58.257 308.695,58.232 309.38,58.232 ; 309.757,45.916 309.529,45.916 308.999,46.445 308.999,46.471 308.974,46.496 308.974,48.084 309.07,48.18 ; 309.939,54.383 310.105,54.217 311.383,54.217 311.983,54.217 312.835,55.069 312.835,55.411 313.546,56.122 ; 309.939,54.468 309.939,56.273 310.004,56.338 310.29,56.338 310.511,56.56 310.511,56.845 310.633,56.966 310.633,57.38 311.031,57.779 311.031,58.232 ; 310.015,50.738 310.383,50.738 310.883,50.238 311.046,50.238 311.265,50.02 312.291,50.02 ; 310.244,44.708 310.556,44.708 311.37,45.522 311.634,45.522 312.099,45.988 ; 310.269,42.66 311.054,42.66 311.463,43.069 312.174,43.069 ; v1(310.485,54.798) 310.485,55.105 310.976,55.595 311.261,55.595 311.383,55.717 ; v1@310.734,47.845 310.734,48.696 311.158,49.12 311.541,49.12 311.641,49.02 312.291,49.02 ; v1@310.784,47.818 310.986,48.02 312.291,48.02 ; 310.794,49.922 310.886,49.83 310.886,49.52 312.291,49.52 ; v1@310.849,49.546 310.422,49.119 310.422,48.259 310.384,48.221 309.111,48.221 309.07,48.18 ; 310.9,47.137 311.282,47.52 312.291,47.52 ; v1(311.158,51.335) 311.158,51.353 311.191,51.386 311.26,51.386 311.501,51.627 311.501,53.049 312.874,54.422 313.546,54.422 ; 311.383,54.717 311.975,54.717 312.53,55.272 312.53,56.923 312.987,57.38 313.292,57.38 313.698,57.787 314.029,57.787 ; 311.383,55.217 312.018,55.217 312.124,55.323 312.124,57.177 312.606,57.66 312.606,57.863 ; 311.383,56.216 311.793,56.216 311.819,56.242 311.819,59.082 314.943,59.082 314.943,56.237 315.121,56.059 315.121,54.281 314.931,54.091 314.931,53.801 314.675,53.545 312.86,53.545 312.454,53.545 311.819,52.91 311.819,51.945 311.806,51.932 311.806,51.312 312.126,50.992 312.578,50.992 312.906,51.32 313.091,51.32 313.114,51.342 ; v1(311.384,48.54) 311.405,48.52 312.291,48.52 ; 311.819,59.906 311.844,59.932 ; 312.003,38.048 310.587,38.048 310.269,38.365 v1(310.269,40.007) 310.269,40.96 310.269,41.543 309.952,41.861 308.898,41.861 308.872,41.886 308.872,42.737 306.759,42.737 305.887,43.608 305.887,45.087 305.912,45.112 307.365,45.112 307.391,45.087 ; 312.003,39.648 313.127,39.648 ; 312.073,45.97 312.073,47.02 312.291,47.02 ; 312.174,44.769 312.174,44.982 313.091,45.899 313.091,46.22 ; v1@312.211,51.753 312.211,52.819 312.632,53.24 314.918,53.24 ; 312.291,50.52 311.756,50.52 311.601,50.675 310.927,50.675 310.592,51.009 310.592,51.382 310.436,51.538 308.047,51.538 307.602,51.983 ; v1(312.352,51.538) 312.479,51.411 312.479,51.691 v1@312.465,51.676 ; 312.911,52.503 313.576,51.839 313.576,51.218 ; 313.592,46.22 313.592,45.524 313.698,45.417 313.698,44.769 ; 313.698,43.069 313.698,42.432 313.724,42.407 317.47,42.407 317.508,42.445 317.508,43.006 ; 314.084,51.243 314.084,52.33 314.232,52.478 ; 314.091,46.22 314.091,45.633 314.308,45.417 314.308,43.301 314.897,42.712 316.864,42.712 317.051,42.899 317.051,43.817 ; v1@314.232,41.658 v1@315.487,41.658 ; 314.562,45.823 314.892,45.493 v1@314.892,44.655 ; 314.592,51.32 314.592,51.974 314.892,52.275 314.892,53.24 ; v1@315.07,43.613 315.553,44.096 315.553,44.807 315.349,45.01 315.349,45.442 315.172,45.62 315.172,45.772 315.091,45.853 315.091,46.093 ; 315.091,51.32 315.091,51.864 v1@315.375,52.148 ; 315.56,53.531 316.45,54.422 317.127,54.422 317.286,54.263 317.414,54.136 317.414,52.381 317.69,52.105 318.499,52.105 ; 315.592,46.22 315.654,46.157 315.654,45.163 316.264,44.553 v1@316.264,43.486 ; 315.592,51.32 315.592,51.645 315.945,51.998 316.738,51.998 317.348,51.388 v1@318.202,51.388 ; 315.821,52.977 315.433,52.977 315.433,56.211 315.248,56.396 315.248,57.572 315.857,58.182 ; 315.857,59.882 314.993,59.882 314.943,59.932 ; v1(315.983,54.739) 315.983,56.4 316.085,56.503 318.55,56.503 318.581,56.534 319.267,56.534 ; 316.091,46.22 316.091,45.544 316.117,45.518 321.903,45.518 ; 316.592,46.22 316.592,46.331 316.797,46.331 317.102,46.026 320.708,46.026 321.013,46.331 322.487,46.331 322.512,46.306 322.512,45.06 321.898,44.446 ; 316.592,51.32 316.681,51.32 317.127,50.873 318.215,50.873 318.55,51.208 318.55,52.097 ; v1(316.848,44.35) 316.848,44.642 316.912,44.706 317.508,44.706 ; 316.904,39.648 315.934,39.648 315.908,39.673 315.908,41.962 315.934,41.988 317.889,41.988 ; 316.904,41.247 317.868,41.247 317.991,41.124 318.855,41.124 319.083,41.353 319.083,43.08 ; 317.051,43.791 318.524,43.791 318.524,42.009 317.911,42.009 ; 317.392,47.02 317.392,46.524 317.559,46.357 320.506,46.357 321.141,46.992 ; 317.392,47.52 317.717,47.52 318.143,47.093 318.143,46.865 318.347,46.661 320.328,46.661 320.506,46.839 320.506,48.871 ; 317.392,48.52 318.016,48.52 317.995,48.541 318.982,48.541 319.54,47.982 ; 317.392,49.02 318.171,49.02 ; 317.392,50.52 317.44,50.568 318.341,50.568 v1(319.109,51.335) ; 317.483,50.06 318.512,50.06 318.895,50.444 ; 317.671,48.012 318.296,48.012 ; v1(318.651,49.455) 318.607,49.455 318.171,49.02 ; 319.032,43.056 319.032,42.597 319.037,42.597 ; 319.032,44.756 319.032,43.944 319.058,43.918 320.404,43.918 320.429,43.893 320.429,43.069 321.09,43.069 321.198,43.177 321.9,43.177 ; 319.159,52.122 318.829,52.453 318.335,52.453 317.889,52.898 317.889,55.12 320.192,55.12 ; 319.214,52.105 320.683,52.105 ; 319.267,54.384 319.267,53.672 319.293,53.646 321.142,53.646 321.168,53.672 ; 319.439,49.645 319.439,49.887 319.667,50.116 319.667,52.105 ; 319.617,49.02 318.171,49.02 ; 320.111,49.405 321.699,49.405 ; 320.201,42.75 320.201,42.42 319.591,41.81 319.591,41.353 317.883,39.644 317.883,39.053 317.749,38.919 317.145,38.919 317.14,38.914 315.473,38.914 314.74,39.648 313.127,39.648 ; 320.218,54.384 320.218,55.094 320.192,55.12 ; 320.248,55.054 320.248,56.552 319.268,57.533 318.651,57.533 316.253,59.932 314.943,59.932 ; 320.429,44.769 320.963,44.769 320.988,44.743 320.988,44.121 321.293,43.817 322.385,43.817 322.817,44.248 322.817,47.339 321.899,48.258 v1@320.937,48.262 ; 320.531,48.897 322.195,48.897 322.512,49.214 322.512,50.116 322.487,50.141 ; 320.898,50.141 322.487,50.141 ; 321.141,46.987 321.899,46.987 ; 321.168,54.384 321.168,53.672 ; v1@321.191,41.353 323.8,41.353 325.281,39.872 ; 322.233,38.965 322.741,39.473 325.255,39.473 ; 323.676,53.896 322.349,55.223 321.422,55.223 321.318,55.12 320.192,55.12 ; 323.731,51.451 321.51,53.672 321.168,53.672 ; 323.731,53.151 323.731,54.397 325.553,56.219 325.789,56.211 ; v1(324.29,48.465) 322.614,50.141 322.487,50.141 ; v1(325.027,51.335) 325.001,51.36 325.001,54.891 326.267,56.156 326.267,56.202 ; 157.711,49.175 157.711,49.999 157.736,50.024 158.447,50.024 158.447,49.2 158.422,49.175 157.711,49.175 ; 162.299,45.085 162.299,47.769 162.714,48.184 163.857,48.184 163.979,48.179 ; 163.223,43.994 163.249,44.349 163.249,44.02 163.223,43.994 ; 163.223,43.994 163.249,43.968 167.744,43.968 167.744,42.113 168.404,41.453 168.395,40.005 168.036,39.646 ; 166.753,59.93 169.852,59.93 ; 193.984,49.174 194.695,49.174 194.72,49.2 194.72,50.024 194.009,50.024 193.984,49.999 193.984,49.174 ; 198.572,45.085 198.572,47.769 198.988,48.184 200.131,48.184 200.252,48.179 ; 199.496,43.994 199.522,44.02 199.522,44.349 199.496,43.994 ; 199.496,43.994 199.522,43.967 204.017,43.967 204.017,42.113 204.677,41.453 204.668,40.005 204.309,39.646 ; 203.026,59.93 206.125,59.93 ; 230.255,49.176 230.967,49.176 230.992,49.201 230.992,50.025 230.281,50.025 230.255,50 230.255,49.176 ; 234.844,45.086 234.844,47.77 235.259,48.185 236.402,48.185 236.524,48.18 ; 235.768,43.995 235.794,44.021 235.794,44.35 235.768,43.995 ; 235.768,43.995 235.794,43.969 240.288,43.969 240.288,42.114 240.949,41.454 240.939,40.006 240.581,39.647 ; 239.298,59.931 242.397,59.931 ; 266.529,49.176 266.529,50 266.554,50.025 267.265,50.025 267.265,49.201 267.24,49.176 266.529,49.176 ; 271.117,45.086 271.117,47.77 271.532,48.185 272.675,48.185 272.797,48.18 ; 272.041,43.995 272.067,44.35 272.067,44.021 272.041,43.995 ; 272.041,43.995 272.067,43.969 276.562,43.969 276.562,42.114 277.222,41.454 277.212,40.006 276.854,39.647 ; 275.571,59.931 278.67,59.931 ; 302.802,49.176 302.802,50 302.827,50.026 303.538,50.026 303.538,49.201 303.513,49.176 302.802,49.176 ; 307.391,45.087 307.391,47.77 307.806,48.185 308.949,48.185 309.07,48.18 ; 308.314,43.995 308.341,44.351 308.341,44.021 308.314,43.995 ; 308.314,43.995 308.341,43.969 312.835,43.969 312.835,42.115 313.495,41.454 313.486,40.007 313.127,39.648 ; 311.844,59.932 314.943,59.932
  Top Layer w0.254: v1@163.411,54.765 v1(163.48,54.695) ; 176.076,54.382 176.761,54.382 v1(176.989,54.61) ; v1@199.684,54.765 v1(199.753,54.695) ; 212.349,54.382 213.034,54.382 v1(213.262,54.61) ; v1@235.955,54.766 v1(236.025,54.696) ; 248.621,54.383 249.306,54.383 v1(249.534,54.611) ; v1@272.229,54.766 v1(272.298,54.696) ; 284.894,54.383 285.579,54.383 v1(285.807,54.611) ; v1@308.502,54.766 v1(308.572,54.697) ; 321.168,54.384 321.853,54.384 v1(322.08,54.612)